# EAGLE board tennisfortwoL151 (EAGLE 9.6.2)
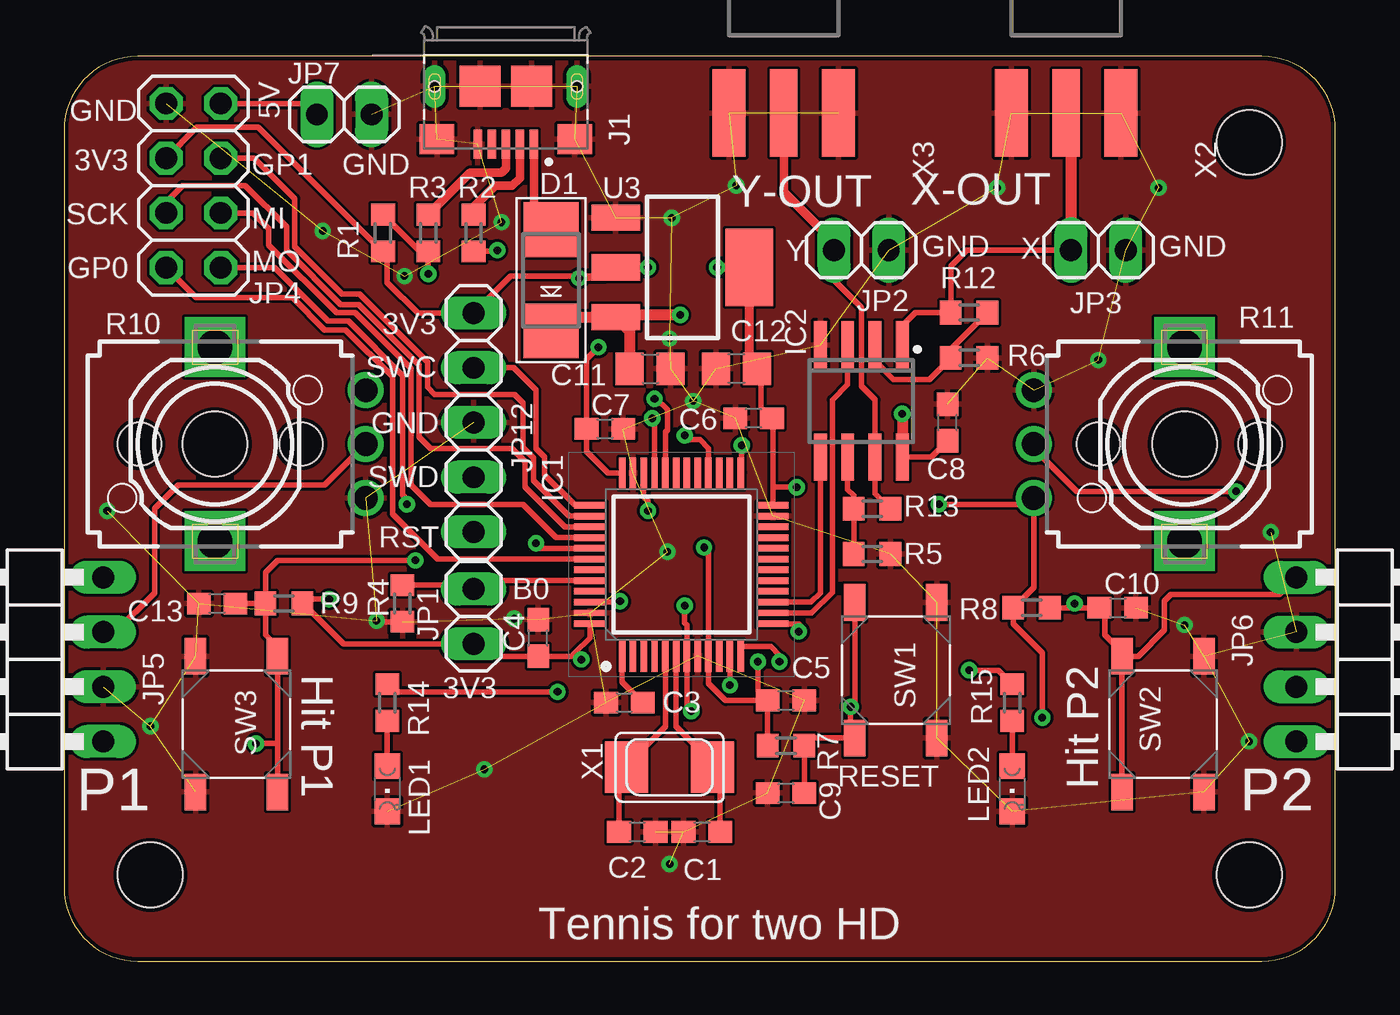
[diagram p0: board, top side]
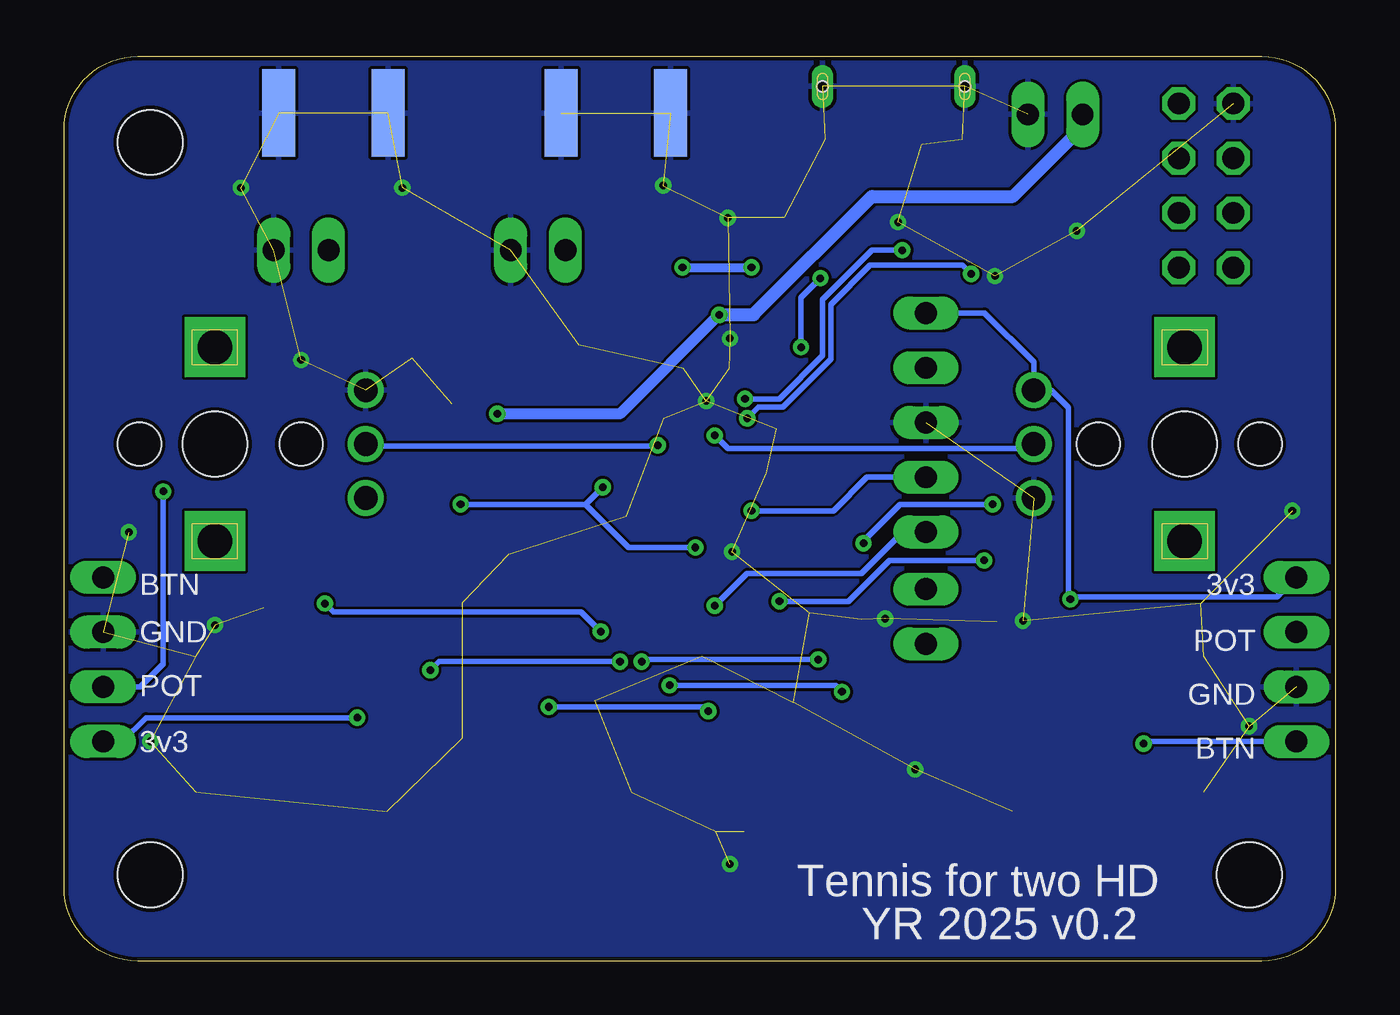
[diagram p1: board, bottom side, seen from below]

Size 59 x 42 mm. Coordinates in mm from the lower left corner, seen from the top.
Outline: 59,3.41 59,38.59 arc90 55.59,42 3.41,42 arc90 0,38.59 0,3.41 arc90 3.41,0 55.59,0 arc90 59,3.41
Copper layers (1*16): Top 0.035mm / dielectric 1.5mm / Bottom 0.035mm
Design rules "jlcpcb *": minimum track width 5mil, minimum drill 0.3mm, track to track 5mil, track to pad 5mil, pad to pad 5mil, via to via 5mil, smd to smd 5mil, copper to edge 0.2mm, drill to drill 8mil, minimum pad ring 10mil, minimum via ring 8mil, stop-mask expansion 4mil, vias tented up to drill 0.4mm, thermal gap 6mil
Holes 3 mm at 55,38 4,4 55,4 7,24 52,24

## Footprints (pad centres in the part's own frame; a part is rotated, then mirrored left to right if it is on the bottom)
C0603 = smd 1.1 x 1: 1 -0.85,0; 2 0.85,0
C0805 = smd 1.3 x 1.5: 1 -0.95,0; 2 0.95,0
SMADIODE = smd 2.54 x 2.54: A 2.349,0; C -2.349,0
QFP50P900X900X160-48N = smd 1.475 x 0.3: 1 -4.238,2.75; 2 -4.238,2.25; 3 -4.238,1.75; 4 -4.238,1.25; 5 -4.238,0.75; 6 -4.238,0.25; 7 -4.238,-0.25; 8 -4.238,-0.75; 9 -4.238,-1.25; 10 -4.238,-1.75; 11 -4.238,-2.25; 12 -4.238,-2.75; 25 4.238,-2.75; 26 4.238,-2.25; 27 4.238,-1.75; 28 4.238,-1.25; 29 4.238,-0.75; 30 4.238,-0.25; 31 4.238,0.25; 32 4.238,0.75; 33 4.238,1.25; 34 4.238,1.75; 35 4.238,2.25; 36 4.238,2.75 | smd 0.3 x 1.475: 13 -2.75,-4.238; 14 -2.25,-4.238; 15 -1.75,-4.238; 16 -1.25,-4.238; 17 -0.75,-4.238; 18 -0.25,-4.238; 19 0.25,-4.238; 20 0.75,-4.238; 21 1.25,-4.238; 22 1.75,-4.238; 23 2.25,-4.238; 24 2.75,-4.238; 37 2.75,4.238; 38 2.25,4.238; 39 1.75,4.238; 40 1.25,4.238; 41 0.75,4.238; 42 0.25,4.238; 43 -0.25,4.238; 44 -0.75,4.238; 45 -1.25,4.238; 46 -1.75,4.238; 47 -2.25,4.238; 48 -2.75,4.238
SO08 = smd 0.6 x 2.2: 1 -1.905,-2.6; 2 -0.635,-2.6; 3 0.635,-2.6; 4 1.905,-2.6; 5 1.905,2.6; 6 0.635,2.6; 7 -0.635,2.6; 8 -1.905,2.6
FCI_10118193-0001LF = smd 0.4 x 1.35: 1 -1.3,2.675; 2 -0.65,2.675; 3 0,2.675; 4 0.65,2.675; 5 1.3,2.675 | smd 1.6 x 1.4: S1 -3.2,2.45; S2 3.2,2.45 | smd 1.9 x 1.9: S3 1.2,0; S4 -1.2,0 | drill 0.5 pad 0.9 long: S5 -3.3,0; S6 3.3,0 | hole 0.5: -3.3,0; 3.3,0
1X02 = drill 1.016 long: 1 -1.27,0; 2 1.27,0
2X04 = drill 1.016 octagon: 1 -3.81,-1.27; 2 -3.81,1.27; 3 -1.27,-1.27; 4 -1.27,1.27; 5 1.27,-1.27; 6 1.27,1.27; 7 3.81,-1.27; 8 3.81,1.27
1X04/90 = drill 1.016 long: 1 -3.81,-3.81; 2 -1.27,-3.81; 3 1.27,-3.81; 4 3.81,-3.81
1X05 = drill 1.016 long: 1 -5.08,0; 2 -2.54,0; 3 0,0; 4 2.54,0; 5 5.08,0
CHIPLED_0805 = smd 1.2 x 1.2: A 0,-1.05; C 0,1.05
R0603 = smd 1 x 1.1: 1 -0.85,0; 2 0.85,0
EVUFXK = drill 1.1 pad 1.676: 1 -2.5,-7; 2 0,-7; 3 2.5,-7 | drill 1.6 pad 2.8 square: M1 4.5,0; M2 -4.5,0 | hole 2: 0,3.5; 0,-4
TL3342F160QG/TR = smd 1.7 x 1: 1 -3.15,-1.9; 2 3.15,-1.9; 3 -3.15,1.9; 4 3.15,1.9
SOT223 = smd 1.219 x 2.235: 1 -2.311,-3.099; 2 0,-3.099; 3 2.311,-3.099 | smd 3.6 x 2.2: 4 0,3.099
NX5032 = smd 2 x 2.4: P$1 2,0; P$2 -2,0
SMA_EDGELAUNCH = smd 4.064 x 1.524: GND@1 2.032,-2.54; GND@2 2.032,2.54 | smd 4.064 x 1.524 bottom: GND@3 2.032,2.54; GND@4 2.032,-2.54 | smd 4.064 x 1.27: P 2.032,0

## Placement (x,y rotation side)
C1  15pF  [C0603]  29.6,6 0 top
C2  15pF  [C0603]  26.6,6 180 top
C3  100nF  [C0603]  26,12 0 top
C4  100nF  [C0603]  22,15 90 top
C5  100nF  [C0603]  33.5,12.1 0 top
C6  100nF  [C0603]  32,25.2 180 top
C7  100nF  [C0603]  25.1,24.7 0 top
C8  100nF  [C0603]  41,25 90 top
C9  100nF  [C0603]  33.5,7.8 180 top
C10  100nF  [C0603]  48.9,16.4 0 top
C11  4.7uF  [C0805]  27.2,27.5 0 top
C12  4.7uF  [C0805]  31.2,27.5 180 top
C13  100nF  [C0603]  7.1,16.6 180 top
D1  [SMADIODE]  22.6,31.6 90 top
IC1  STM32L151C8T6A  [QFP50P900X900X160-48N]  28.65,18.41 90 top
IC2  MCP602SN  [SO08]  37,26 180 top
J1  10118193-0001LF  [FCI_10118193-0001LF]  20.5,40.6 180 top
JP1  Boot0  [1X02]  19,16 90 top
JP2  Y-Out  [1X02]  37,33 0 top
JP3  X-Out  [1X02]  48,33 0 top
JP4  [2X04]  6,36 90 top
JP5  BTN0  [1X04/90]  -2,14 90 top
JP6  BTN1  [1X04/90]  61,14 270 top
JP7  Supply  [1X02]  13,39.3 180 top
JP12  [1X05]  19,25 90 top
LED1  [CHIPLED_0805]  15,8 180 top
LED2  [CHIPLED_0805]  44,8 180 top
R1  1.5k  [R0603]  14.8,33.8 90 top
R2  22  [R0603]  19,33.8 90 top
R3  22  [R0603]  16.9,33.8 90 top
R4  1.5k  [R0603]  15.7,16.6 90 top
R5  1.5k  [R0603]  37.5,18.9 0 top
R6  1.5k  [R0603]  42,28 0 top
R7  10k  [R0603]  33.5,10 0 top
R8  10k  [R0603]  44.9,16.4 0 top
R9  10k  [R0603]  10.2,16.6 180 top
R10  US-EVUF2K  [EVUFXK]  7,24 90 top
R11  US-EVUF2K  [EVUFXK]  52,24 270 top
R12  3.3k  [R0603]  42,30.1 0 top
R13  3.3k  [R0603]  37.5,21 180 top
R14  1.5k  [R0603]  15,12 90 top
R15  1.5k  [R0603]  44,12 90 top
SW1  TL3342F160QG/TR  [TL3342F160QG/TR]  38.6,13.5 90 top
SW2  TL3342F160QG/TR  [TL3342F160QG/TR]  51,11 90 top
SW3  TL3342F160QG/TR  [TL3342F160QG/TR]  8,11 270 top
U3  [SOT223]  28.7,32.2 270 top
X1  8MHz  [NX5032]  28.1,9 180 top
X2  [SMA_EDGELAUNCH]  46.5,41.4 270 top
X3  [SMA_EDGELAUNCH]  33.4,41.4 270 top

## Library data of the parts
C1-C13 R1-R9 R12-R15 = resistor
D1 X1-X3 = adafruit
IC1 = SamacSys_Parts; ARROW_PART_NUMBER: STM32L151C8T6A; ARROW_PRICE-STOCK: https://www.arrow.com/en/products/stm32l151c8t6a/stmicroelectronics?utm_currency=USD&region=nac; DESCRIPTION: ARM Microcontrollers - MCU 16/32-BITS MICROS; HEIGHT: 1.6mm; MANUFACTURER_NAME: STMicroelectronics; MANUFACTURER_PART_NUMBER: STM32L151C8T6A; MOUSER_PART_NUMBER: 511-STM32L151C8T6A; MOUSER_PRICE-STOCK: https://www.mouser.co.uk/ProductDetail/STMicroelectronics/STM32L151C8T6A?qs=9MuLHSklicqYSyvoDULfVw%3D%3D
IC2 = linear
J1 = con_ampusb_10118193-0001LF; AVAILABILITY: Unavailable; DESCRIPTION: Single Port 5 Contact Shielded SMT MICRO USB B-Type Receptacle; MF: Amphenol ICC; MP: 10118193-0001LF; PACKAGE: None; PRICE: None
JP1-JP7 JP12 = pinhead
LED1 LED2 = led
R10 R11 = pot
SW1-SW3 = Switch; CREATED_BY: PCBLayout.com; DIGI_KEY_PART_NUMBER: EG2531CT-ND; MANUFACTURER: E-Switch; MPN: TL3342F160QG/TR; PACKAGE: SPST_NO
U3 = SparkFun-IC-Power; PROD_ID: VREG-08170

## Nets
+3V3: C4.1 C5.1 C6.1 C7.1 C12.1 IC1.9 IC1.24 IC1.36 IC1.48 JP1.1 JP4.6 JP5.4 JP6.4 JP12.5 R1.1 R7.1 R8.1 R9.1 R10.3 R11.3 U3.2 U3.4
BOOT0: IC1.44 JP1.2 R4.2
BTN0: C13.1 IC1.46 JP5.1 R9.2 SW3.3 SW3.4
BTN1: C10.1 IC1.13 JP6.1 R8.2 SW2.3 SW2.4
DAC_X: IC1.14 IC2.3
DAC_Y: IC1.15 IC2.5
GND: C1.1 C2.1 C3.1 C4.2 C5.2 C6.2 C7.2 C8.2 C9.2 C10.2 C11.2 C12.2 C13.2 IC1.8 IC1.23 IC1.35 IC1.47 IC2.4 J1.5 J1.S1 J1.S2 J1.S3 J1.S4 J1.S5 J1.S6 JP2.2 JP3.2 JP4.8 JP5.2 JP6.2 JP7.1 JP12.3 LED1.C LED2.C R4.1 R5.2 R6.2 R10.1 R11.1 SW1.1 SW1.2 SW2.1 SW2.2 SW3.1 SW3.2 U3.1 X2.GND@1 X2.GND@2 X2.GND@3 X2.GND@4 X3.GND@1 X3.GND@2 X3.GND@3 X3.GND@4
LED0: IC1.11 R14.2
LED1: IC1.12 R15.2
MISO: IC1.40 JP4.3
MOSI: IC1.41 JP4.1
N$1: C3.2 IC1.1
N$2: D1.A J1.1
N$3: LED1.A R14.1
N$4: LED2.A R15.1
N$5: J1.2 R2.2
N$6: J1.3 R3.2
N$7: IC2.2 R6.1 R12.2
N$8: IC2.6 R5.1 R13.2
NRST: C9.1 IC1.7 JP12.1 R7.2 SW1.3 SW1.4
OSC+: C1.2 IC1.6 X1.P$2
OSC-: C2.2 IC1.5 X1.P$1
OUT0: IC1.42 JP4.2
OUT1: IC1.38 JP4.5
OUT3: IC1.45
POT1: IC1.28 JP5.3 R10.2
POT2: IC1.25 JP6.3 R11.2
SCK: IC1.39 JP4.4
SWCLK: IC1.37 JP12.4
SWDIO: IC1.34 JP12.2
USB_D+: IC1.33 R1.2 R3.1
USB_D-: IC1.32 R2.1
V+: C8.1 C11.1 D1.C IC2.8 JP4.7 JP7.2 U3.3
X_OUT: IC2.1 JP3.1 R12.1 X2.P
Y_OUT: IC2.7 JP2.1 R13.1 X3.P

## Tracks (layer width: path | path; a pad name or v marks a point on that pad's centre or on a via)
+3V3  (via drill 0.35)
  Top 0.254: IC1.24 32.89,22.1 | 32.89,22.1 32.89,25.16 C6.1 32.35,25.7 32.35,27.3 | C5.1 30.7,12.1 29.9,12.9 IC1.9 29.9,19 v29.7,19.2 | 23.55,14.15 C4.1 19.58,14.15 JP1.1 12.97,14.73 11.1,16.6 R9.1 11.25,16.8 v12.3,16.8 | IC1.48 24.41,15.01 23.7,14.3 | 23.55,14.15 23.7,14.3 | IC1.36 25.25,22.65 24.25,23.65 C7.1 24.25,27.95 v24.8,28.5 | v40.6,21.2 44.7,21.2 R11.3 45,17.35 R8.1 44.05,15.65 45.4,14.3 v45.4,11.3 | v34,22 32.99,22 32.89,22.1 | v23.9,31.7 25.1,31.7 U3.2 25.2,31.8 20.72,31.8 JP12.5 16.42,30.08 15,31.5 15,32.75 R1.1 14.75,32.95 9.3,38.4 9,38.7 6.16,38.7 JP4.6 | 23.55,14.15 23.65,14.15 | v32.2,13.9 32.2,12.55 C5.1 | 23.7,14.3 v24,14 | C5.1 R7.1
  Top 0.406: v30.3,32.2 U3.4 31.8,27.85 C12.1 32.35,27.3 | v27.1,32.2 U3.2
  Bottom 0.254: JP12.5 16.28,30.08 14,27.8 R10.3 13.2,26.5 12.4,25.7 12.4,16.9 v12.3,16.8 12.2,16.9 2.72,16.9 JP5.4 | v40.6,21.2 34.8,21.2 | 34.8,21.2 v34,22 | v29.7,19.2 32.8,19.2 34.8,21.2 | v24.8,28.5 24.8,30.8 v23.9,31.7 | v24,14 32.1,14 v32.2,13.9 | JP6.4 56.31,10.19 55.2,11.3 v45.4,11.3
  Bottom 0.406: v30.3,32.2 v27.1,32.2
BOOT0
  Top 0.254: R4.2 15.72,17.47 18.8,17.47 JP1.2 19.77,17.27 20.16,17.66 IC1.44
BTN0  (via drill 0.35)
  Top 0.254: IC1.46 25.76,16.66 v25.8,16.7 | R9.2 9.35,15.15 9.9,14.6 SW3.3 | v16.3,18.6 9.9,18.6 9.35,18.05 R9.2 | SW3.3 9.9,13.77 | SW3.4 9.9,10.1 | 9.9,10.1 SW3.3 | C13.1 R9.2 | v8.9,10.1 9.9,10.1
  Bottom 0.254: v25.8,16.7 22.6,16.7 20.7,18.6 v16.3,18.6 | JP5.1 8.81,10.19 v8.9,10.1
BTN1  (via drill 0.35)
  Top 0.254: v34.1,15.3 34.1,15.66 IC1.13 | SW2.3 SW2.4 | JP6.1 56.39,17.01 51.36,17.01 51.07,16.72 51.07,15.37 49.85,14.15 SW2.4 | SW2.4 49.1,14.35 48.3,15.15 48.3,16.4 C10.1 R8.2 46.7,16.4 v46.9,16.6
  Bottom 0.254: v34.1,15.3 35,16.2 46.5,16.2 v46.9,16.6
DAC_X
  Top 0.254: IC1.14 34.7,16.16 35.65,17.11 35.65,26.05 36.37,26.77 IC2.3
DAC_Y
  Top 0.254: IC1.15 34.66,16.66 35.09,17.09 IC2.5
GND  (via drill 0.35)  (72 unrouted)
  Top 0.254: R4.1 14.55,15.75 v14.5,15.8
  other vias: 28,19 28.1,28.9 28.2,34.5 31.2,36 43.3,35.9 50.8,35.9 52,15.6 55,10.2 28.1,4.5 19.5,8.9 4,10.9 29.2,26 20.9,15.9 2,20.9 56,19.9 48,27.9 12,33.9 15.8,31.8 20.3,34.3
  pour Top: -6,46 -6,-3 62,-3 62,46
  pour Bottom: -6,46 -6,-3 62,-3 62,46
LED0  (via drill 0.35)
  Top 0.254: IC1.11 v30.9,12.8 | v22.9,12.5 15.35,12.5 R14.2
  Bottom 0.254: v30.9,12.8 23.2,12.8 v22.9,12.5
LED1  (via drill 0.35)
  Top 0.254: IC1.12 31.4,14.6 32.8,14.6 33.2,14.2 v33.2,13.9 | v42,13.5 43.35,13.5 R15.2
  Bottom 0.254: v33.2,13.9 41.6,13.9 v42,13.5
MISO
  Top 0.254: IC1.40 22.84,19.66 21.3,21.2 17,21.2 16.1,22.1 16.1,27.5 13.5,30.1 12.64,30.1 9.5,33.24 9.5,34 8.77,34.73 JP4.3
MOSI  (via drill 0.35)
  Top 0.254: IC1.41 21.9,19.16 v21.9,19.4 | v15.9,21.2 15.9,21.46 15.72,21.64 15.72,27.18 13.2,29.7 12.26,29.7 9.77,32.19 JP4.1
  Bottom 0.254: v21.9,19.4 21.9,19.5 20.2,21.2 v15.9,21.2
N$1
  Top 0.254: C3.2 25.9,12.95 IC1.1
N$2
  Top 0.4: J1.1 21.8,34.75 D1.A
N$3
  Top 0.254: R14.1 LED1.A
N$4
  Top 0.254: R15.1 LED2.A
N$5
  Top 0.4: J1.2 21.15,36.35 20.8,36 20,36 19,35 R2.2
N$6
  Top 0.4: J1.3 20.5,36.8 20.3,36.6 18.85,36.6 R3.2
N$7
  Top 0.254: R12.2 41.15,28.4 R6.1 40.15,27 38.5,27 37.63,27.86 IC2.2
N$8
  Top 0.254: IC2.6 36.37,21.9 36.65,21.61 R13.2 R5.1
NRST  (via drill 0.35)
  Top 0.254: v29.1,11.6 28.9,11.8 IC1.7 28.9,15.6 28.8,15.7 v28.8,16.5 | SW1.4 36.7,12 v36.5,11.8 36.5,10.55 SW1.3 34.7,10.35 R7.2 C9.1
  Bottom 0.254: v36.5,11.8 29.3,11.8 v29.1,11.6 | JP12.1 20.08,19.92 22,18 27.3,18 v28.8,16.5
OSC+
  Top 0.254: IC1.6 28.4,10.9 30.1,9.2 X1.P$2 30.45,8.65 C1.2
OSC-
  Top 0.254: IC1.5 27.9,10.9 26.1,9.1 X1.P$1 25.75,8.65 C2.2
OUT0
  Top 0.254: IC1.42 17.34,18.66 15.24,20.76 15.24,27.12 13.06,29.3 12.1,29.3 10.6,30.8 6.12,30.8 JP4.2
OUT1
  Top 0.254: IC1.38 23.44,20.66 21.78,22.32 21.78,23.36 21.3,23.84 21.3,25.9 20.9,26.3 17.2,26.3 16.86,26.64 16.86,27.82 13.72,30.96 12.9,30.96 10.7,33.16 10.7,35.4 8.83,37.27 JP4.5
POT1  (via drill 0.35)
  Top 0.254: IC1.28 29.9,23.8 29.5,24.2 29,24.2 v28.8,24.4 | JP5.3 2.37,15.27 4.2,17.1 4.2,21 5.3,22.1 12.1,22.1 R10.2
  Bottom 0.254: R10.2 14.2,23.8 28.2,23.8 v28.8,24.4
POT2  (via drill 0.35)
  Top 0.254: IC1.25 31.44,22.69 v31.44,23.94 | v54.4,21.8 47,21.8 45,23.8 R11.2
  Bottom 0.254: R11.2 44.91,23.91 31.48,23.91 v31.44,23.94 | JP6.3 55.47,12.73 54.4,13.8 v54.4,21.8
SCK
  Top 0.254: IC1.39 23.24,20.16 21.4,22 21.4,23.2 20.8,23.8 17,23.8 16.48,24.32 16.48,27.66 13.66,30.48 12.84,30.48 10.32,33 10.32,34.08 8.4,36 5.5,36 4.73,35.23 JP4.4
SWCLK
  Top 0.254: IC1.37 23.71,21.16 22.3,22.57 22.3,23.4 21.9,23.8 21.9,26.5 20.86,27.54 JP12.4
SWDIO  (via drill 0.35)
  Top 0.254: IC1.34 26.9,21.55 27.1,21.35 v27.1,20.9
  Bottom 0.254: v27.1,20.9 23.3,20.9 21.74,22.46 JP12.2
USB_D+  (via drill 0.35)
  Top 0.254: IC1.33 27.4,25.2 27.39,25.2 v27.3,25.2 | v16.9,31.9 R3.1 16.5,32.95 R1.2
  Bottom 0.254: v27.3,25.2 26.78,25.72 25.64,25.72 23.42,27.94 23.42,30.48 21.6,32.3 17.3,32.3 v16.9,31.9
USB_D-  (via drill 0.35)
  Top 0.254: R2.1 20.05,32.95 v20.1,33 | v27.4,26.1 27.5,26.1 28,25.6 28,24.65 27.9,24.55 IC1.32
  Bottom 0.254: v20.1,33 21.5,33 23.8,30.7 23.8,28.1 25.8,26.1 v27.4,26.1
V+  (via drill 0.35)
  Top 0.254: C8.1 40.26,23.41 IC2.8 | JP4.7 11.22,39.81 JP7.2
  Top 0.5: D1.C 23.24,29.89 U3.3 | U3.3 26.25,29.24 C11.1 | U3.3 25.71,30 v28.6,30 | v38.9,25.4 IC2.8
  Bottom 0.5: v28.6,30 33.2,25.4 v38.9,25.4
  Bottom 0.6: v28.6,30 27,30 21.5,35.49 14.97,35.49 11.73,38.74 JP7.2
X_OUT
  Top 0.254: IC2.1 38.91,29.5 39.5,30.1 R12.1 41.15,32.25 41.9,33 JP3.1
  Top 0.4: X2.P 46.73,39.14 46.73,37.6
  Top 0.5: 46.73,38.7 46.73,37.6 JP3.1
Y_OUT
  Top 0.254: R13.1 37.63,21.71 IC2.7 37.63,26.07 37,26.7 37,30.33 35.73,31.6 JP2.1
  Top 0.4: X3.P 33.4,35.7 35.73,33.37 JP2.1
  Top 0.5: 35.73,33.41 JP2.1

## Text on the board
tPlace: GND | 5V | 3V3 | X-OUT | GP1 | GND | Y-OUT | SCK | MI | GP0 | GND | X | GND | MO | Y | 3V3 | SWC | GND | SWD | RST | B0 | Hit P1 | 3V3 | P1 | RESET | P2 | Hit P2 | Tennis for two HD
bPlace: 3v3 | BTN | POT | GND | GND | POT | BTN | 3v3 | Tennis for two HD | YR 2025 v0.2